# EAGLE board my_tic_tac_toe_board (EAGLE 6.5.0)
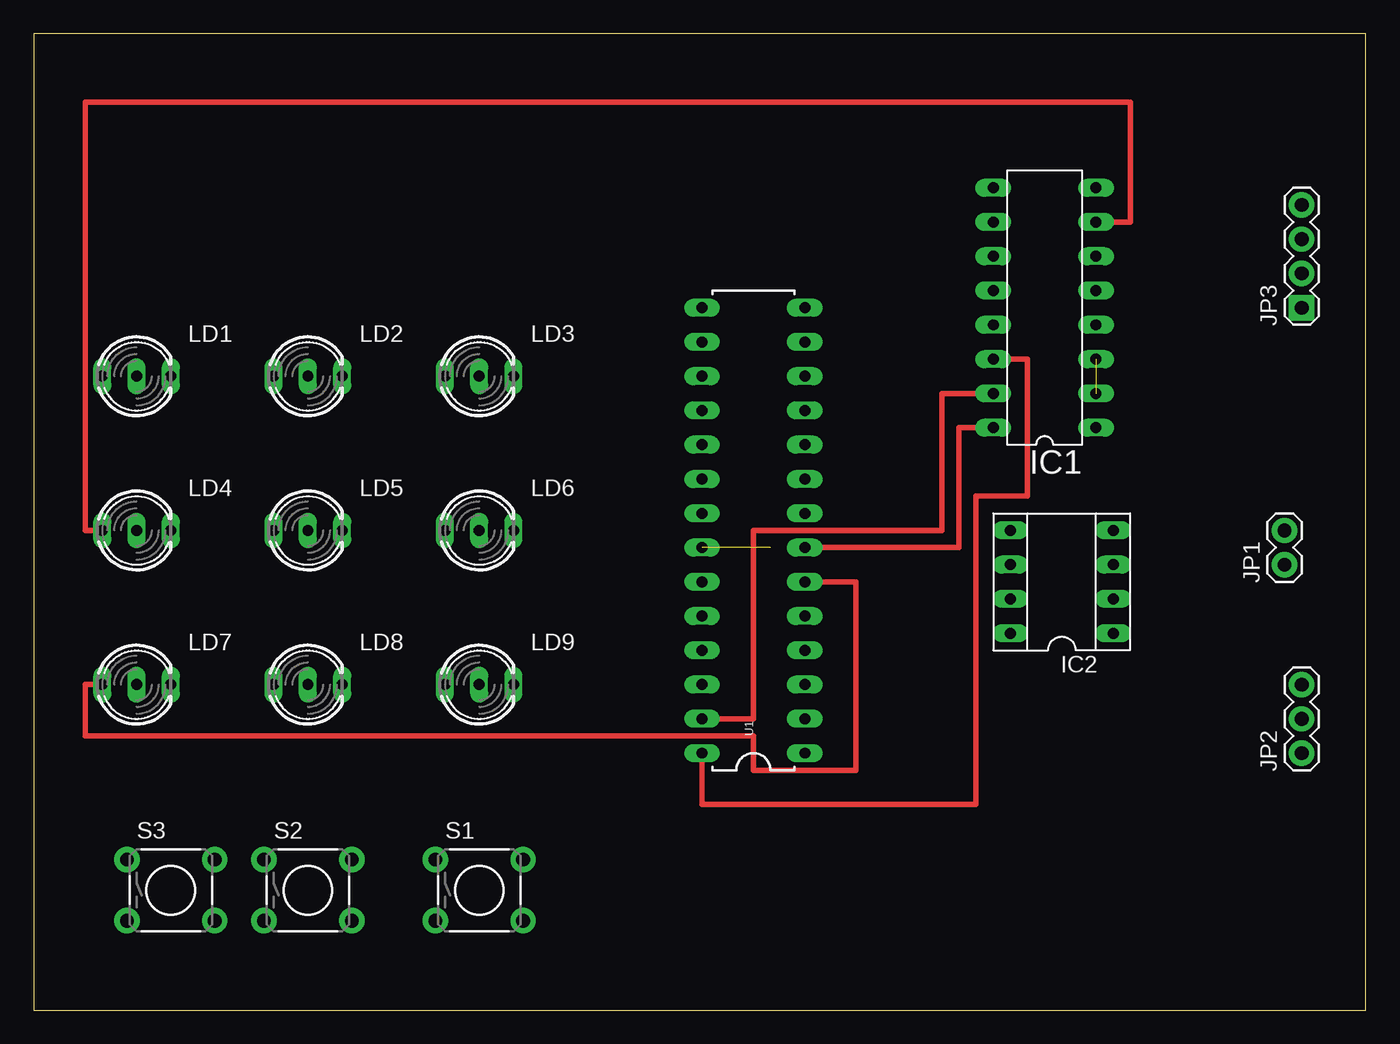
[diagram p0: board, top side]
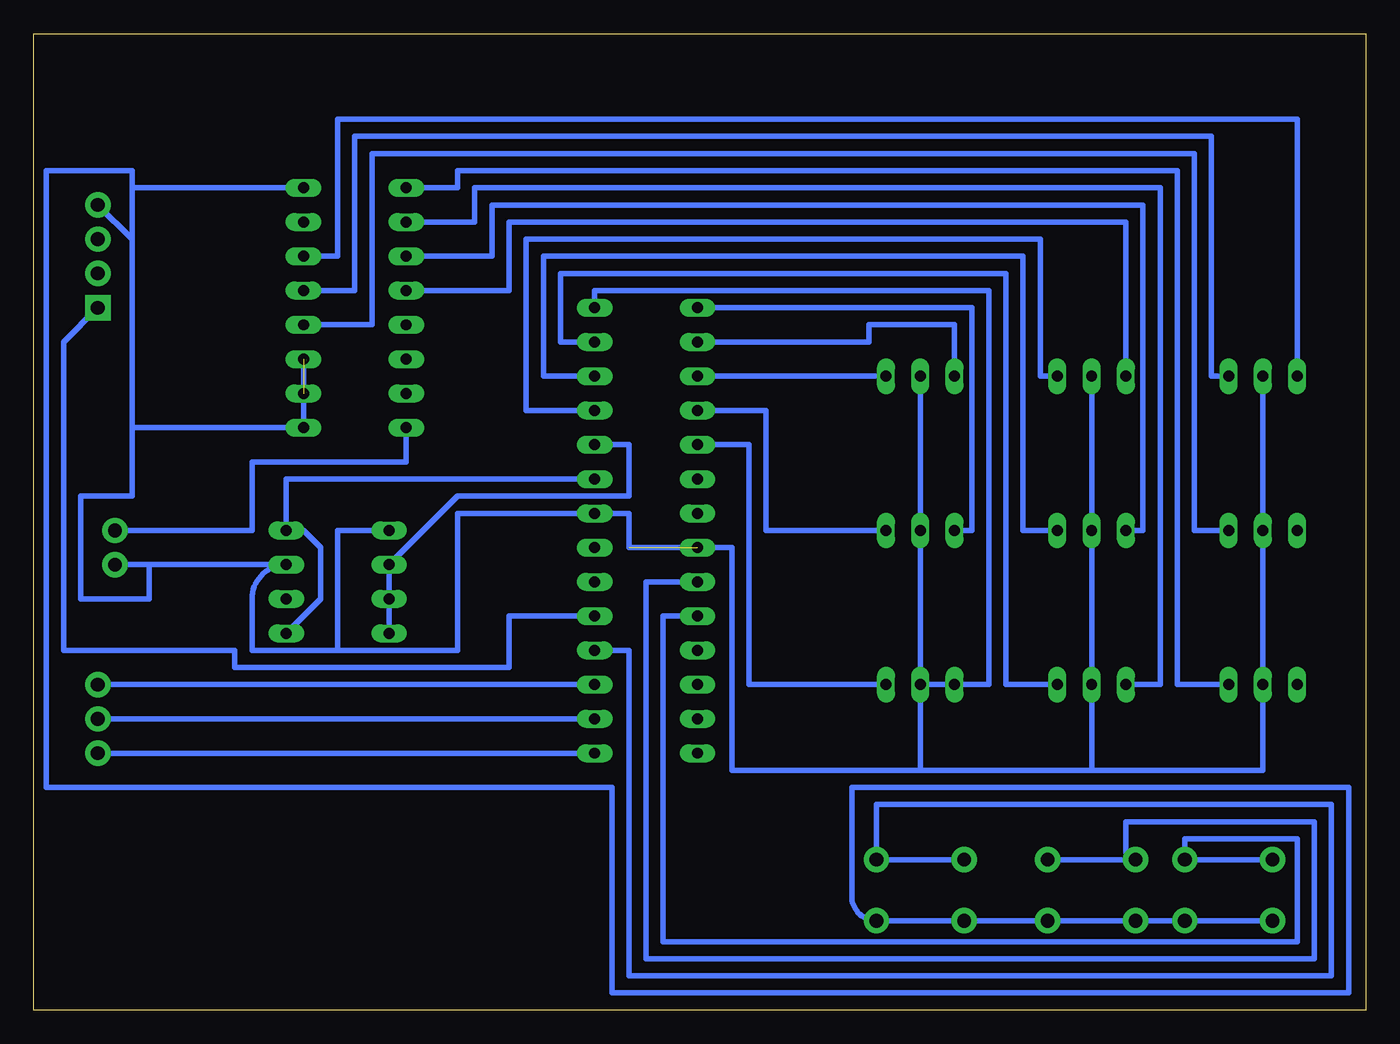
[diagram p1: board, bottom side, seen from below]

Size 98.73 x 72.38 mm. Coordinates in mm from the lower left corner, seen from the top.
Outline: 0,0 98.73,0 98.73,72.38 0,72.38 0,0
Copper layers (1*16): Top 0.035mm / dielectric 1.5mm / Bottom 0.035mm
Design rules "default": minimum track width 10mil, minimum drill 24mil, track to track 8mil, track to pad 8mil, pad to pad 8mil, via to via 8mil, smd to smd 8mil, copper to edge 40mil, drill to drill 8mil, minimum pad ring 10mil, minimum via ring 8mil, stop-mask expansion 4mil, vias tented up to drill 0mil, thermal gap 10mil

## Footprints (pad centres in the part's own frame; a part is rotated, then mirrored left to right if it is on the bottom)
DIL16 = drill 0.813 long: 1 -8.89,-3.81; 2 -6.35,-3.81; 3 -3.81,-3.81; 4 -1.27,-3.81; 5 1.27,-3.81; 6 3.81,-3.81; 7 6.35,-3.81; 8 8.89,-3.81; 9 8.89,3.81; 10 6.35,3.81; 11 3.81,3.81; 12 1.27,3.81; 13 -1.27,3.81; 14 -3.81,3.81; 15 -6.35,3.81; 16 -8.89,3.81
SOCKET-08 = drill 0.813 long: 1 -3.81,-3.81; 2 -1.27,-3.81; 3 1.27,-3.81; 4 3.81,-3.81; 5 3.81,3.81; 6 1.27,3.81; 7 -1.27,3.81; 8 -3.81,3.81
1X02 = drill 1.016 pad 1.88: 1 0,0; 2 2.54,0
1X03 = drill 1.016 pad 1.88: 1 0,0; 2 2.54,0; 3 5.08,0
1X04 = drill 1.016 pad 1.88 square: 1 0,0 | drill 1.016 pad 1.88: 2 2.54,0; 3 5.08,0; 4 7.62,0
DUOLED-C-5MM = drill 0.813 long: AR 2.54,0; AX -2.54,0; C 0,0
TACTILE-PTH = drill 1.016 pad 1.88: 1 -3.251,2.261; 2 3.251,2.261; 3 -3.251,-2.261; 4 3.251,-2.261
DIL28-3 = drill 0.813 long: 1 -16.51,-3.81; 2 -13.97,-3.81; 3 -11.43,-3.81; 4 -8.89,-3.81; 5 -6.35,-3.81; 6 -3.81,-3.81; 7 -1.27,-3.81; 8 1.27,-3.81; 9 3.81,-3.81; 10 6.35,-3.81; 11 8.89,-3.81; 12 11.43,-3.81; 13 13.97,-3.81; 14 16.51,-3.81; 15 16.51,3.81; 16 13.97,3.81; 17 11.43,3.81; 18 8.89,3.81; 19 6.35,3.81; 20 3.81,3.81; 21 1.27,3.81; 22 -1.27,3.81; 23 -3.81,3.81; 24 -6.35,3.81; 25 -8.89,3.81; 26 -11.43,3.81; 27 -13.97,3.81; 28 -16.51,3.81

## Placement (x,y rotation side)
IC1  PCF8574P  [DIL16]  74.93,52.07 90 top
IC2  [SOCKET-08]  76.2,31.75 90 top
JP1  M02PTH  [1X02]  92.71,33.02 90 top
JP2  [1X03]  93.98,19.05 90 top
JP3  [1X04]  93.98,52.07 90 top
LD1  [DUOLED-C-5MM]  7.62,46.99 0 top
LD2  [DUOLED-C-5MM]  20.32,46.99 0 top
LD3  [DUOLED-C-5MM]  33.02,46.99 0 top
LD4  [DUOLED-C-5MM]  7.62,35.56 0 top
LD5  [DUOLED-C-5MM]  20.32,35.56 0 top
LD6  [DUOLED-C-5MM]  33.02,35.56 0 top
LD7  [DUOLED-C-5MM]  7.62,24.13 0 top
LD8  [DUOLED-C-5MM]  20.32,24.13 0 top
LD9  [DUOLED-C-5MM]  33.02,24.13 0 top
S1  [TACTILE-PTH]  33.02,8.89 0 top
S2  [TACTILE-PTH]  20.32,8.89 0 top
S3  [TACTILE-PTH]  10.16,8.89 0 top
U1  ATMEGA328P_PDIP  [DIL28-3]  53.34,35.56 90 top

## Library data of the parts
IC1 = micro-philips; MPN: PCF8574PN; OC_FARNELL: 204020; OC_NEWARK: 11N8515
IC2 = ic-package
JP1-JP3 = SparkFun-Connectors
LD1-LD9 = led
S1-S3 = SparkFun-Electromechanical
U1 = SparkFun-DigitalIC

## Nets
N$1: IC1.16 JP1.2 U1.7
N$2: IC1.1 IC1.2 IC1.3 IC1.8 IC2.3 IC2.5 JP1.1 JP3.4 LD1.C LD2.C LD3.C LD7.C S1.3 S1.4 S2.3 S2.4 S3.3 S3.4 U1.8 U1.14 U1.22
N$3: JP2.1 U1.1
N$4: JP2.2 U1.2
N$5: JP2.3 U1.3
N$6: IC1.15 U1.27
N$7: IC1.14 U1.28
N$8: S1.1 S1.2 U1.4
N$9: IC2.1 IC2.4 U1.9
N$10: S3.1 S3.2 U1.24
N$12: IC2.6 IC2.8 U1.10
N$13: S2.1 S2.2 U1.23
N$14: JP3.1 U1.5
S$1: LD9.AR U1.19
S$2: LD6.AR U1.18
S$3: LD3.AR U1.17
S$4: LD3.AX U1.16
S$5: LD6.AX U1.15
S$6: LD8.AR U1.13
S$7: LD5.AR U1.12
S$8: LD2.AR U1.11
S$9: IC1.12 LD2.AX
S$10: IC1.11 LD5.AX
S$11: IC1.10 LD8.AX
S$12: IC1.9 LD7.AR
S$13: IC1.4 LD4.AR
S$14: IC1.5 LD1.AR
S$15: IC1.6 LD1.AX
S$16: LD7.AX U1.6
S$17: IC1.7 LD4.AX

## Tracks (layer width: path | path; a pad name or v marks a point on that pad's centre or on a via)
N$1
  Top 0.406: U1.7 68.58,34.29 68.58,43.18 IC1.16
  Bottom 0.406: JP1.2 82.55,35.56 82.55,40.64 71.12,40.64 IC1.16
N$2  (2 unrouted)
  Bottom 0.406: 90.17,33.02 IC2.3 arc-90 82.55,30.48 82.55,26.67 76.2,26.67 | 90.17,33.02 JP1.1 | JP3.4 91.44,57.15 | 91.44,57.15 91.44,43.18 | S3.3 S3.4 S2.3 S2.4 S1.3 S1.4 arc90 38.1,8.46 38.1,16.51 1.27,16.51 1.27,1.27 55.88,1.27 55.88,16.51 97.79,16.51 97.79,62.23 91.44,62.23 91.44,60.96 | 91.44,43.18 IC1.1 IC1.3 | 91.44,43.18 91.44,38.1 95.25,38.1 95.25,30.48 90.17,30.48 90.17,33.02 | IC1.8 91.44,60.96 | 91.44,60.96 91.44,57.15 | 76.2,26.67 76.2,35.56 IC2.5 | 76.2,26.67 67.31,26.67 67.31,36.83 U1.8 54.61,36.83 54.61,34.29 U1.22 46.99,34.29 46.99,17.78 33.02,17.78 | LD1.C LD7.C 7.62,17.78 20.32,17.78 | 20.32,17.78 33.02,17.78 | LD3.C 33.02,24.13 | 33.02,24.13 33.02,17.78 | LD2.C 20.32,17.78 | 33.02,24.13 27.94,24.13 27.94,53.34 57.15,53.34 U1.14
N$3
  Bottom 0.406: JP2.1 U1.1
N$4
  Bottom 0.406: JP2.2 U1.2
N$5
  Bottom 0.406: JP2.3 U1.3
N$6
  Top 0.406: IC1.15 67.31,45.72 67.31,35.56 53.34,35.56 53.34,21.59 U1.27
N$7
  Top 0.406: IC1.14 73.66,48.26 73.66,38.1 69.85,38.1 69.85,15.24 49.53,15.24 U1.28
N$8
  Bottom 0.406: U1.4 54.61,26.67 54.61,2.54 2.54,2.54 2.54,15.24 36.27,15.24 S1.2 S1.1
N$9
  Bottom 0.406: U1.9 80.01,39.37 IC2.4 78.74,35.56 77.47,34.29 77.47,30.48 IC2.1
N$10
  Bottom 0.406: S3.1 S3.2 13.41,12.7 5.08,12.7 5.08,5.08 52.07,5.08 52.07,29.21 U1.24
N$12
  Bottom 0.406: IC2.8 IC2.6 67.31,38.1 54.61,38.1 54.61,41.91 U1.10
N$13
  Bottom 0.406: U1.23 53.34,31.75 53.34,3.81 3.81,3.81 3.81,13.97 17.78,13.97 17.78,11.71 arc90 S2.1 S2.2
N$14
  Bottom 0.406: JP3.1 96.52,49.53 96.52,26.67 83.82,26.67 83.82,25.4 63.5,25.4 63.5,29.21 U1.5
S$1
  Bottom 0.406: LD9.AR 45.72,24.13 45.72,41.91 U1.19
S$2
  Bottom 0.406: LD6.AR 44.45,35.56 44.45,44.45 U1.18
S$3
  Bottom 0.406: LD3.AR U1.17
S$4
  Bottom 0.406: LD3.AX 30.48,50.8 36.83,50.8 36.83,49.53 U1.16
S$5
  Bottom 0.406: LD6.AX 29.21,35.56 29.21,52.07 U1.15
S$6
  Bottom 0.406: LD8.AR 26.67,24.13 26.67,54.61 59.69,54.61 59.69,49.53 U1.13
S$7
  Bottom 0.406: LD5.AR 25.4,35.56 25.4,55.88 60.96,55.88 60.96,46.99 U1.12
S$8
  Bottom 0.406: LD2.AR 24.13,46.99 24.13,57.15 62.23,57.15 62.23,44.45 U1.11
S$9
  Bottom 0.406: LD2.AX 17.78,58.42 63.5,58.42 63.5,53.34 IC1.12
S$10
  Bottom 0.406: LD5.AX 16.51,35.56 16.51,59.69 64.77,59.69 64.77,55.88 IC1.11
S$11
  Bottom 0.406: LD8.AX 15.24,24.13 15.24,60.96 66.04,60.96 66.04,58.42 IC1.10
S$12
  Bottom 0.406: LD7.AR 13.97,24.13 13.97,62.23 67.31,62.23 67.31,60.96 IC1.9
S$13
  Bottom 0.406: LD4.AR 12.7,35.56 12.7,63.5 73.66,63.5 73.66,50.8 IC1.4
S$14
  Bottom 0.406: LD1.AR 11.43,46.99 11.43,64.77 74.93,64.77 74.93,53.34 IC1.5
S$15
  Bottom 0.406: LD1.AX 5.08,66.04 76.2,66.04 76.2,55.88 IC1.6
S$16
  Top 0.406: U1.6 60.96,31.75 60.96,17.78 53.34,17.78 53.34,20.32 3.81,20.32 3.81,24.13 LD7.AX
S$17
  Top 0.406: LD4.AX 3.81,35.56 3.81,67.31 81.28,67.31 81.28,58.42 IC1.7